# Altium PCB LEO_COTS_ant_rev1.PcbDoc
Units mil, origin at the board's own origin, x right, y up, seen from the top; angles counter-clockwise.
Board outline 1574.8 x 393.7 mil, 2 copper layers (Top Layer, Bottom Layer), stack 14.8 mil thick; 31 components, 24 nets, 126 pads, 30 vias.
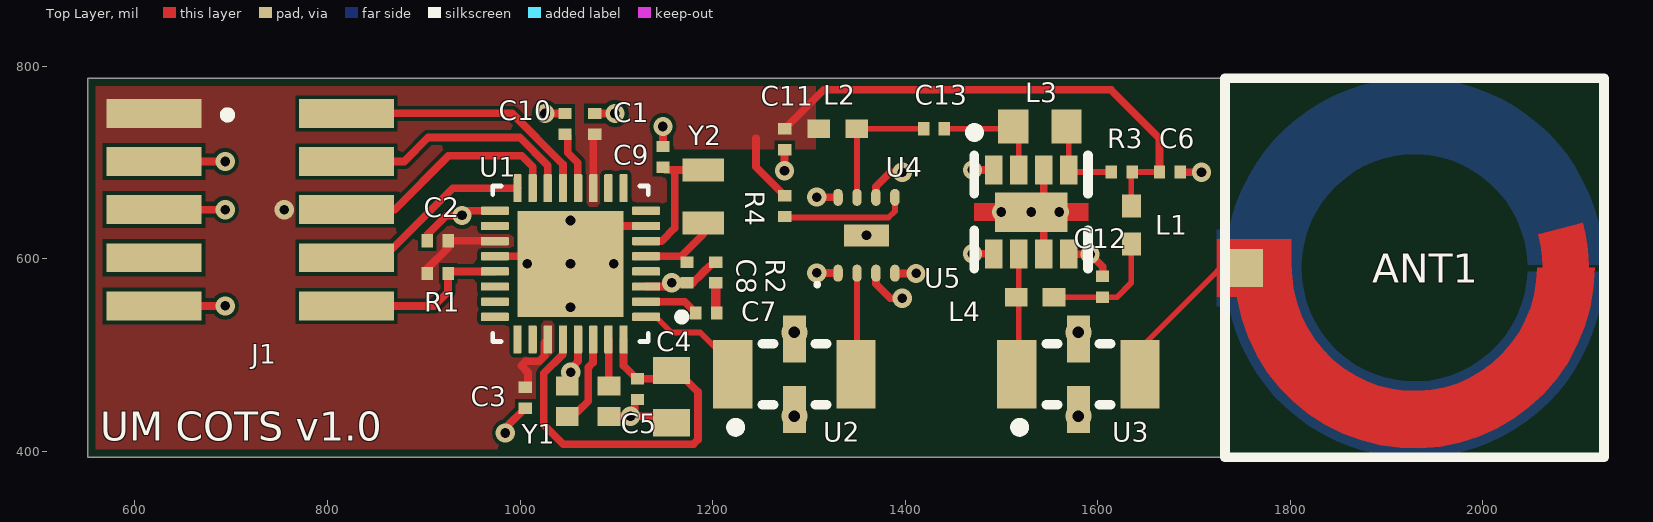
[diagram p0: Top Layer view]
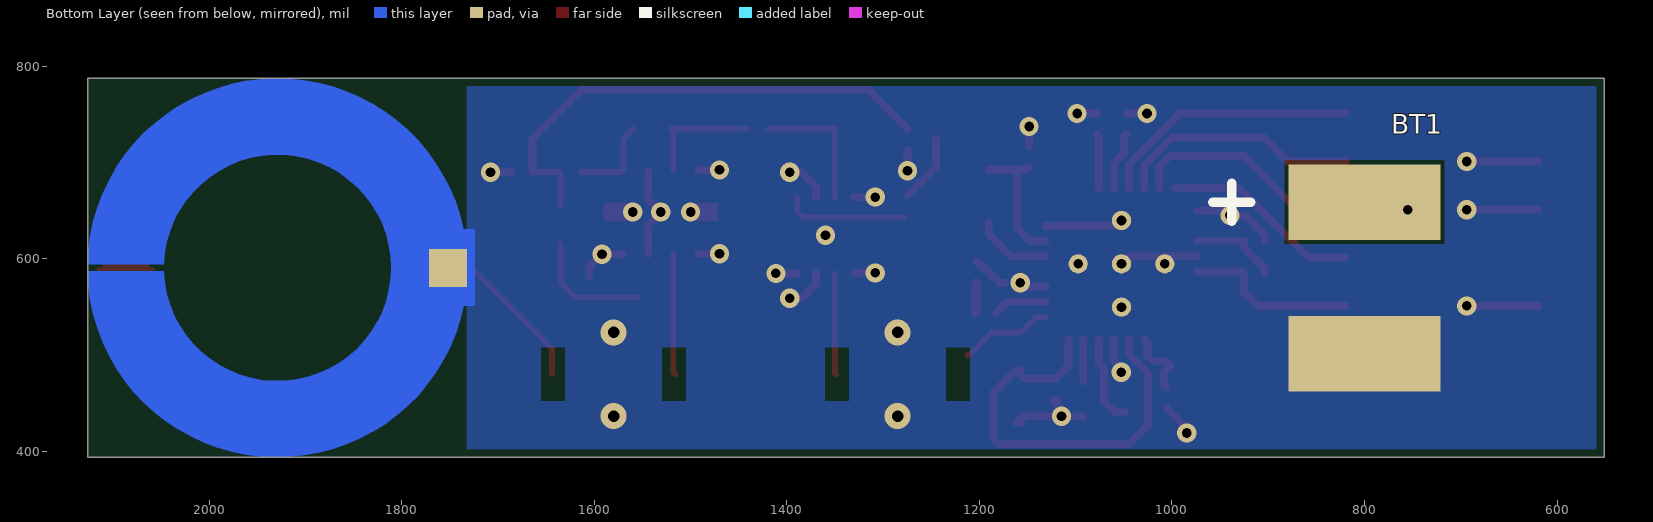
[diagram p1: Bottom Layer view, seen from below]
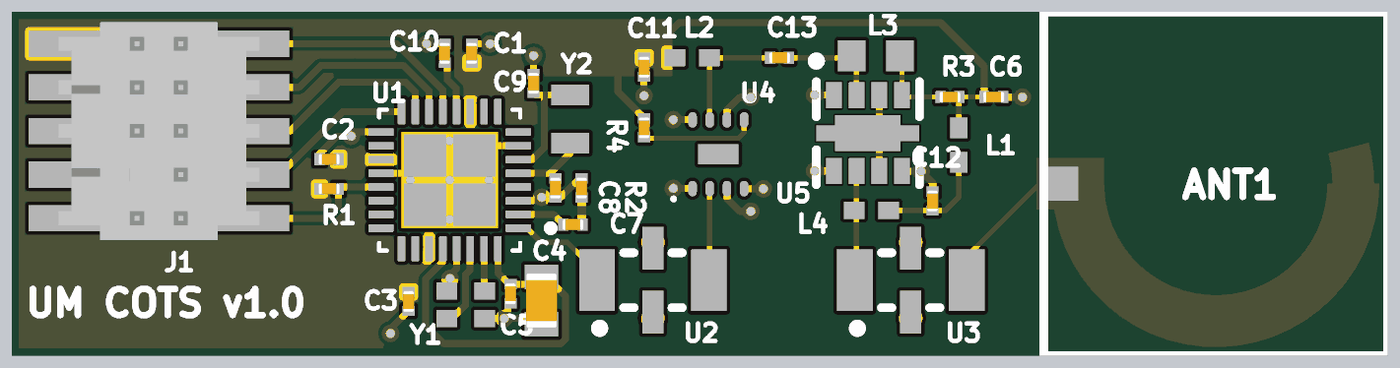
[diagram p2: 3D render of the assembled board from above, using the file's embedded part models]

## Layer stack, top to bottom
Top Solder: solder mask 0.4, Solder Resist, Dk 3.5
Top Layer: signal copper 1.4
Dielectric 1: core 12, RO4003C-012, Dk 3.55
Bottom Layer: signal copper 1.4
Bottom Solder: solder mask 0.4, Solder Resist, Dk 3.5

## Board outline
551.18,393.7 2125.98,393.7 2125.98,787.4 551.18,787.4

## Design rules (kind name [scope] priority, off if disabled: settings)
BoardOutlineClearance BoardOutlineClearance_1 [All] p1: gap=8 ignorepadtopadclearanceinfootprint=FALSE
Clearance [All] p1: gap=4 ignorepadtopadclearanceinfootprint=FALSE
HoleSize [All] p1: absolutevalues=TRUE maxlimit=100 minlimit=8 maxpercent=80.000 minpercent=20.000
MinimumAnnularRing [All] p1: minimumring=5
MinimumSolderMaskSliver [All] p1 off: minsoldermaskwidth=10
PlaneConnect [All] p1: planeconnectstyle=Direct reliefexpansion=20 reliefentries=4 reliefconductorwidth=10 reliefairgap=10
PolygonConnect [All] p1: connectstyle=Direct reliefconductorwidth=10 reliefentries=4 polygonreliefangle="90 Angle" airgapwidth=10
RoutingVias [All] p1: holewidth=10 width=20 viastyle="Through Hole" minholewidth=8 minwidth=16 maxholewidth=90 maxwidth=100
SilkToSilkClearance [All] p1 off: silktosilkclearance=10
SilkToSolderMaskClearance [IsPad] p1 off: minsilkscreentomaskgap=10 clearancetoexposedcopper=TRUE
SolderMaskExpansion [All] p1: expansion=4
Width [All] p1: maxlimit=100 minlimit=4 preferedwidth=4
25 further rules are at their usual default settings.

## Components (designator, comment, footprint, x,y, rotation, side; value= is the part's Value field where it differs from the comment)
ANT1 "ANT" RESLOOP_OD10_fw15_fl180_sw12_sl15 1929.13,590.55 r180 top
BT1 "BATT_LIPO" LIPO_1cm_1cm 800,580 r0 bottom
C1 "CAP_0201" CAPC0603X04N 1077.7,740 r270 top value=100nF
C2 "CAP_0201" CAPC0603X04N 914.4,618.7 r0 top value=100nF
C3 "CAP_0201" CAPC0603X04N 1005.4,455.7 r90 top value=100nF
C4 "CAP_0603" CAPC1608X05N 1157.48,456.69 r270 top value=10uF
C5 "CAP_0201" CAPC0603X04N 1122.05,464.57 r90 top value=100nF
C6 "CAP_0201" CAPC0603X04N 1675,690 r180 top value=100nF
C7 "CAP_0201" CAPC0603X04N 1193.4,543.7 r180 top value=12pF
C8 "CAP_0201" CAPC0603X04N 1173.4,585.7 r90 top value=12pF
C9 "CAP_0201" CAPC0603X04N 1148.4,705.7 r270 top value=12pF
C10 "CAP_0201" CAPC0603X04N 1046.7,740 r270 top value=1uF
C11 "CAP_0201" CAPC0603X04N 1275,724.17 r90 top value=100nF
C12 "CAP_0201" CAPC0603X04N 1605,570.83 r270 top value=100nF
C13 "CAP_0201" CAPC0603X04N 1430,735 r180 top value=12pF
J1 "10-Pin JTAG" FTSH-105-01-F-DV-007-K 719.7,651 r0 top
L1 "Inductor" 0402 1635,635 r270 top value=30nH
L2 "Inductor" 0402 1330,735 r0 top value=2.7nH
L3 "Inductor" 1608[0603] 1540,737.35 r180 top value=390nH
L4 "Inductor" 0402 1535,560 r180 top value=2.7nH
R1 "RES_0201" CAPC0603X04N 914.4,584.7 r180 top value=1K
R2 "RES_0201" CAPC0603X04N 1203.4,585.7 r270 top value=50
R3 "RES_0201" CAPC0603X04N 1625,690 r0 top value=432
R4 "RES_0201" CAPC0603X04N 1275,654.68 r90 top value=470
U1 "CC1350F128RSMR" QFN40P400X400X100-33N 1052.4,594.7 r180 top
U2 "BFCN-3085+" FV1206 1285,480 r0 top
U3 "BFCN-3085+" FV1206 1580,480 r0 top
U4 "MAAL-011078" PDFN-8 1359.84,624.37 r90 top
U5 "CMA-545+" DL1721 1531,648.5 r90 top
Y1 "830108160801" LFXTAL081608 1070.7,452 r180 top
Y2 "ECS-.327-7-12-TR" XTAL_ECS-.327-7-12-TR 1190.4,664.7 r90 top

## Footprints (in the part's own frame and the unit in brackets; to place one, negate y for a bottom-side part, rotate by r counter-clockwise, add the part's x,y. Pads: shape width x height; smd on the part's side, far side on the other; paste and mask are expansions set on the pad)
0402 [mm] "Chip Capacitor, Body 1.0x0.5mm, IPC High Density"
  rect 0.6x0.5 smd: 1(-0.5,0) 2(0.5,0)
  body extent -0.55,-0.3 0.55,0.3, height 1.3
1608[0603] [mm] "Chip Capacitor, Body 1.6x0.8mm, IPC High Density"
  rect 0.8x0.9 smd: 1(-0.7,0) 2(0.7,0)
  body extent -0.87,-0.48 0.87,0.48, height 1.3
CAPC0603X04N [mm] "Chip Capacitor, 2-Leads, Body 0.60x0.30mm, IPC Medium Density"
  rect 0.3x0.35 smd: 1(-0.275,0) 2(0.275,0)
  body extent -0.32,-0.17 0.32,0.17, height 0.35
CAPC1608X05N [mm] "Chip Capacitor, 2-Leads, Body 1.55x0.85mm, IPC Medium Density"
  rect 0.72x0.98 smd: 1(-0.69,0) 2(0.69,0)
  body extent -0.8,-0.45 0.8,0.45, height 0.5
DL1721 [mil]
  rect 30x18 smd paste+0 mask+2: 1(43.5,39) 2(43.5,13) 3(43.5,-13) 4(43.5,-39)
  rect 30x18 smd mask+2: 5(-43.5,-39) 6(-43.5,-13) 7(-43.5,13) 8(-43.5,39)
  rect 41x75 smd paste+0 mask+2: 9(0,0)
  Top Layer region: 9,-35.43 9,-59 -9,-59 -9,-35.43
  Top Layer region: -9,35.43 -9,59 9,59 9,35.43
  silkscreen extent -59,-59 88,64, body extent -59,-59 59,59, height 45
FTSH-105-01-F-DV-007-K [mil]
  rect 98.43x30 smd: 1(-100,100) 2(100,100) 3(-100,50) 4(100,50) 5(-100,0) 6(100,0) 7(-100,-50) 8(100,-50) 9(-100,-100) 10(100,-100)
  silkscreen extent -28,94 -20,102, body extent -115,-125 115,125, height 240
FV1206 [mm]
  rect 1.04x1.8 smd: 1(-1.625,0) 3(1.625,0)
  rect 0.61x1.245 smd: 2(0,-0.927) 4(0,0.927)
  silkscreen extent -1.67,-1.52 0.85,0.8, body extent -1.6,-0.8 1.6,0.8, height 0.94
LFXTAL081608 [mm] "1.6mm x 1.2mm SMD crystal"
  rect 0.6x0.5 smd: 1(-0.55,-0.4) 2(0.55,-0.4) 3(0.55,0.4) 4(-0.55,0.4)
  body extent -0.8,-0.6 0.8,0.6, height 0.4
LIPO_1cm_1cm [mm]
  rect 4x2 smd: 1(0,-2) 2(0,2)
  silkscreen extent 3,-2.5 4,-1.5
PDFN-8 [mm]
  oval 0.45x0.25 smd: 1(-1,0.75) 2(-1,0.25) 3(-1,-0.25) 4(-1,-0.75) 5(1,-0.75) 6(1,-0.25) 7(1,0.25) 8(1,0.75)
  rect 0.58x1.18 smd: 9(0,0)
  silkscreen extent -1.35,1.25 -1.25,1.35, body extent -1,-1 1,1, height 1
QFN40P400X400X100-33N [mm]
  rrect25% 0.74x0.22 smd: 1(-1.995,1.4) 2(-1.995,1) 3(-1.995,0.6) 4(-1.995,0.2) 5(-1.995,-0.2) 6(-1.995,-0.6) 7(-1.995,-1) 8(-1.995,-1.4) 17(1.995,-1.4) 18(1.995,-1) 19(1.995,-0.6) 20(1.995,-0.2) 21(1.995,0.2) 22(1.995,0.6) 23(1.995,1) 24(1.995,1.4)
  rrect25% 0.22x0.74 smd: 9(-1.4,-1.995) 10(-1,-1.995) 11(-0.6,-1.995) 12(-0.2,-1.995) 13(0.2,-1.995) 14(0.6,-1.995) 15(1,-1.995) 16(1.4,-1.995) 25(1.4,1.995) 26(1,1.995) 27(0.6,1.995) 28(0.2,1.995) 29(-0.2,1.995) 30(-0.6,1.995) 31(-1,1.995) 32(-1.4,1.995)
  round 0.508 hole 0.254: 33(-1.143,0) 33(0,1.143) 33(0,0) 33(0,-1.143) 33(1.143,0)
  rect 2.8x2.8 smd paste-2: 33(0,0)
  silkscreen extent -3.04,-2.05 2.05,2.05, body extent -2,-2 2,2, height 1
RESLOOP_OD10_fw15_fl180_sw12_sl15 [mm] "Microstrip resonant planar loop"
  rect 1x1 smd mask+0.102: 1(4.5,0)
  rect 1x1 smd far side mask+0.102: 2(4.5,0)
  Top Layer region: -4.75,0 -4.6,0 -4.561,-0.6 -4.443,-1.191 -4.443,-1.191 -3.284,-0.88 -3.371,-0.444 -3.4,0 -3.4,0 -3.25,0 -3.23,0.356 -3.172,0.709 -3.075,1.052 -2.941,1.383 -2.772,1.697 -2.569,1.991 -2.335,2.261 -2.073,2.503 -1.786,2.715 -1.477,2.895 -1.151,3.039 -0.81,3.147 -0.46,3.217 -0.105,3.248 0.252,3.24 0.606,3.193 0.953,3.107 1.288,2.984 1.607,2.825 1.907,2.632 2.184,2.406 2.435,2.152 2.656,1.872 2.846,1.57 3.001,1.248 3.12,0.912 3.208,0.52 3.248,0.12 3.25,0.009 3.25,-0.003 3.25,-0.75 5.2,-0.75 5.2,0.75 4.69,0.75 4.559,1.332 4.386,1.824 4.159,2.294 3.882,2.737 3.559,3.146 3.192,3.517 2.787,3.846 2.349,4.129 1.882,4.361 1.392,4.541 0.886,4.667 0.368,4.736 -0.153,4.748 -0.673,4.702 -1.185,4.6 -1.682,4.442 -2.159,4.231 -2.61,3.969 -3.029,3.659 -3.412,3.304 -3.754,2.91 -4.051,2.481 -4.298,2.021 -4.494,1.538 -4.636,1.036 -4.721,0.521
  Top Layer lines w0.013: 5.2,0.75 5.2,-0.75 3.25,-0.75 3.25,-0.401 3.25,-0.072 3.25,-0.017 3.25,-0.003 3.25,0.009 3.248,0.12 3.208,0.52 3.12,0.912 3.001,1.248 2.846,1.57 2.656,1.872 2.435,2.152 2.184,2.406 1.907,2.632 1.607,2.825 1.288,2.984 0.953,3.107 0.606,3.193 0.252,3.24 -0.105,3.248 -0.46,3.217 -0.81,3.147 -1.151,3.039 -1.477,2.895 -1.786,2.715 -2.073,2.503 -2.335,2.261 -2.569,1.991 -2.772,1.697 -2.941,1.383 -3.075,1.052 -3.172,0.709 -3.23,0.356 -3.25,0 -3.4,0 ccw(c0,0) -3.284,-0.88 -4.443,-1.191 cw(c0,0) -4.6,0 -4.75,0 -4.721,0.521 -4.636,1.036 -4.494,1.538 -4.298,2.021 -4.051,2.481 -3.754,2.91 -3.412,3.304 -3.029,3.659 -2.61,3.969 -2.159,4.231 -1.682,4.442 -1.185,4.6 -0.673,4.702 -0.153,4.748 0.368,4.736 0.886,4.667 1.392,4.541 1.882,4.361 2.349,4.129 2.787,3.846 3.192,3.517 3.559,3.146 3.882,2.737 4.159,2.294 4.386,1.824 4.559,1.332 4.69,0.75 5.2,0.75
  Bottom Layer region: -4.999,-0.1 -2.998,-0.1 -2.555,-1.572 -1.442,-2.631 0.05,-3 1.529,-2.581 2.606,-1.486 3,0 2.606,1.486 1.529,2.581 0.05,3 -1.442,2.631 -2.555,1.572 -2.998,0.1 -2.998,0.1 -4.999,0.1 -4.372,2.427 -2.729,4.189 -0.453,4.979 1.929,4.613 3.862,3.175 4.899,1 4.899,1 5.2,1 5.2,-1 4.899,-1 3.862,-3.175 1.929,-4.613 -0.453,-4.979 -2.729,-4.189 -4.372,-2.427 -4.999,-0.1
  Bottom Layer lines w0.013: 5.2,1 5.2,-1 4.899,-1 cw(c0,0) -4.999,-0.1 -2.998,-0.1 ccw(c0,0) -2.998,0.1 -4.999,0.1 cw(c0,0) 4.899,1 5.2,1
XTAL_ECS-.327-7-12-TR [mm]
  rect 0.6x1.1 smd: 1(-0.7,0) 2(0.7,0)
  body extent -1,-0.6 1,0.6, height 0.25

## Part data
ANT1: "PCB antenna"
C1 C2 C3 C5 C6 C11 C12: "CAP CER 100nF 0201"
C4: "CAP CER 10uF 0603"
C7 C8 C9: "CAP CER 12pF 0201"
C10: "CAP CER 1uF 0201"
C13: "CAP CER 12pF 0201", Supplier Part Number 1=490-11308-1-ND, Supplier 1=Digi-Key
J1: library part CM10, "10-pin JTAG", Supplier Part Number 1=FTSH-105-01-L-DV-007-K-P-ND, Supplier 1=Digi-Key
L1: Supplier Part Number 1=2035-0402HP-300EKTSCT-ND, Code_IEC=1005, Code_JEITA=0402, LatestRevisionDate=29-May-2009, LatestRevisionNote="IPC-7351 Footprint Added.", PackageDescription="Chip Inductor", PackageReference=0402-A, Published=8-Jun-2000, Publisher="Altium Limited", Supplier 1=Digi-Key
L2 L4: Supplier Part Number 1=2035-1403-1-ND, Code_IEC=1005, Code_JEITA=0402, LatestRevisionDate=29-May-2009, LatestRevisionNote="IPC-7351 Footprint Added.", PackageDescription="Chip Inductor", PackageReference=0402-A, Published=8-Jun-2000, Publisher="Altium Limited", Supplier 1=Digi-Key
L3: Supplier Part Number 1=490-LQW18CNR39J0ZDCT-ND, Code_IEC=1005, Code_JEITA=0402, LatestRevisionDate=29-May-2009, LatestRevisionNote="IPC-7351 Footprint Added.", PackageDescription="Chip Inductor", PackageReference=0402-A, Published=8-Jun-2000, Publisher="Altium Limited", Supplier 1=Digi-Key
R1: library part "Res Semi", "RES 1K OHM 0201", LatestRevisionDate=17-Jul-2002, LatestRevisionNote="Re-released for DXP Platform.", PackageDescription="Axial Device, Thru-Hole; 2 Leads; 0.5 in Pin Spacing", PackageReference=AXIAL-0.5, Published=8-Jun-2000, Publisher="Altium Limited"
R2: library part "Res Semi", "RES 50 OHM 0201", LatestRevisionDate=17-Jul-2002, LatestRevisionNote="Re-released for DXP Platform.", PackageDescription="Axial Device, Thru-Hole; 2 Leads; 0.5 in Pin Spacing", PackageReference=AXIAL-0.5, Published=8-Jun-2000, Publisher="Altium Limited"
R3: library part "Res Semi", "RES 50 OHM 0201", Supplier Part Number 1=P123009CT-ND, LatestRevisionDate=17-Jul-2002, LatestRevisionNote="Re-released for DXP Platform.", PackageDescription="Axial Device, Thru-Hole; 2 Leads; 0.5 in Pin Spacing", PackageReference=AXIAL-0.5, Published=8-Jun-2000, Publisher="Altium Limited", Supplier 1=Digi-Key
R4: library part "Res Semi", "RES 50 OHM 0201", Supplier Part Number 1=P123030CT-ND, LatestRevisionDate=17-Jul-2002, LatestRevisionNote="Re-released for DXP Platform.", PackageDescription="Axial Device, Thru-Hole; 2 Leads; 0.5 in Pin Spacing", PackageReference=AXIAL-0.5, Published=8-Jun-2000, Publisher="Altium Limited", Supplier 1=Digi-Key
U1: "Ultra-Low-Power Dual-Band Wireless MCU", Supplier Part Number 1=296-48897-1-ND, Supplier 1=Digi-Key
U2 U3: "2800 to 3400 MHz Band-Pass Filter", Supplier 1=Mini-Circuits, Supplier Part Number 1=BFCN-3085+
U4: "Wideband LNA", Supplier Part Number 1=1465-1489-1-ND, Manufacturer Part Number=MAAL-011078, Supplier 1=Digi-Key
U5: "Wideband LNA", Supplier 1=Mini-Circuits, Supplier Part Number 1=CMA-545+
Y1: "24 MHz crystal", Package=None, Availability=Unavailable, MP=ECS-.327-7-12-TR, Price=None
Y2: "32.768 kHz SMD Crystal", Package=None, Availability=Unavailable, MP=ECS-.327-7-12-TR, Price=None

## Via types
v1: diameter 20, hole 10, Top Layer to Bottom Layer, tented both sides, 22 vias
v2: diameter 20, hole 10, Top Layer to Bottom Layer, 4 vias
v3: diameter 27, hole 12, Top Layer to Bottom Layer, 4 vias

## Nets (pads, with @x,y where several pads share a name; then routed paths per layer and width w, separated by ;. In a path a pad name is that pad's centre, name@x,y a point inside that pad or via, vN(x,y) a via of type N, cw(c..) or ccw(c..) an arc to the next point about the centre after c; other vN are vias at no path point)
GND: ANT1.2 BT1.2 C1.1 C2.1 C3.1 C4.2 C5.1 C6.1 C8.1 C9.1 C10.1 C11.1 C12.1 J1.3 J1.5 J1.9 R2.1 U1.3 U1.7 U1.17 U1.20 U1.29 U1.33 U2.2 U2.4 U3.2 U3.4 U4.1 U4.3 U4.4 U4.6 U4.8 U4.9 U5.1 U5.3 U5.5 U5.6 U5.8 U5.9 Y1.2 Y1.4 | length 1154.3
  Top Layer w8: J1.9 v1(693.7,551) ; J1.5 v1(693.7,651) ; J1.3 v1(693.7,701) ; C2.1 903.57,624.87 923.7,645 v1(939.7,645) 944.52,649.82 U1.17 ; U1.20 1044.53,602.57 U1.33@1052.4,594.7 ; v1(984.7,419) 984.7,424.17 C3.1 ; v1(1025.87,750.83) C10.1 ; v1@1049.05,482.35 1060.28,493.57 U1.29 ; U1.33@1060.28,634.07 U1.7 ; C1.1 v1(1098.53,750.83) ; Y1.4 v1(1114.78,436.25) ; C5.1@1123.95,451.83 C5.1 1121.06,453.74 1119.16,451.83 1119.16,443.88 1114.78,439.5 v1(1114.78,436.25) ; U1.3 1151.78,571.08 1155.7,575 v1(1157.7,575) ; C9.1 v1(1148.4,737.35) ; C4.2@1156.3,429.53 C4.2 1161.42,429.53 1154.69,436.25 v1(1114.78,436.25) ; C8.1 1179.57,574.87 1188.51,583.81 1188.51,584.09 1193.2,588.78 1193.48,588.78 1201.23,596.53 R2.1 ; v1(1274.74,691.35) C11.1@1274.74,713.09 ; v1(1308.31,585.26) U4.1@1330.06,585.26 ; v1(1308.31,664) U4.8@1330.06,664 ; U4.3 1369.68,574.06 1384.74,559 v1(1397,559) ; U4.6 1369.68,674.68 1384.74,689.74 v1(1397,689.74) ; U4.4@1389.63,584.74 v1(1411.37,584.74) ; v1(1470,605.26) U5.8@1491.74,605.26 ; v1(1470,692.26) 1491.74,692.26 U5.1 ; U5.6 1544,635.5 v2(1531,648.5) 1544,661.5 U5.3 ; U5.5@1570.26,604.74 v1(1592,604.74) 1605.26,591.48 C12.1@1605.26,581.91 ; C6.1@1686.09,689.74 v1(1707.83,689.74)
  other v1: 1052.7,482
  other v2: 1359.84,624.37 1500,648.5 1560,648.5
  other v3: 1285,436.5 1580,436.5 1285,523.5 1580,523.5
JTAG_RSTN: J1.10 R1.1 U1.21 | length 180.2
  Top Layer w8: J1.10 910.7,551 925.23,565.53 R1.1 927.35,586.83 U1.21
JTAG_TCK: J1.4 U1.14 | length 255.1
  Top Layer w8: J1.4 879.7,701 904.7,726 999.63,726 1028.78,696.85 U1.14
JTAG_TDI: J1.8 U1.16 | length 207.5
  Top Layer w8: J1.8 857.7,601 929.94,673.24 U1.16
JTAG_TDO: J1.6 U1.15 | length 243.6
  Top Layer w8: J1.6 869.7,651 925.7,707 1001.66,707 1013.03,695.62 U1.15
JTAG_TMS: J1.2 U1.13 | length 271.6
  Top Layer w8: J1.2 991.6,751 1044.53,698.07 U1.13
NetANT1_1: ANT1.1 U3.3 | length 151.6
  Top Layer w6: U3.3 1643.98,506.69 1724.41,587.13 ANT1.1@1732.28,595
NetC4_1: C4.1 C5.2 U1.28 U1.32 | length 443.5
  Top Layer w8: U1.28 1044.2,515.83 1044.2,500.5 1024.7,481 1024.7,427.63 1044.98,407.35 1180.09,407.35 1184.77,412.04 1184.77,461.69 1162.6,483.86 C4.1@1161.42,483.86 ; U1.32 1107.52,488.94 1121.06,475.39 C5.2 1152.95,475.39 C4.1@1161.42,483.86 ; C4.1 C4.1@1161.42,483.86
NetC7_1: C7.1 R2.2 | length 31.5
  Top Layer w10: R2.2 1203.4,544.53 C7.1
NetC7_2: C7.2 U1.2 | length 56.4
  Top Layer w8: U1.2 1170.94,555.33 C7.2
NetC8_2: C8.2 U1.5 Y2.1 | length 80.5
  Top Layer w8: U1.5 1167.35,602.57 1190.4,625.62 Y2.1
NetC9_2: C9.2 U1.6 Y2.2 | length 138.8
  Top Layer w8: U1.6 1147.02,618.32 1160.7,632 1160.7,692.26 ; C9.2 1151.02,692.26 1160.7,692.26 ; Y2.2 1160.7,692.26
NetC10_2: C10.2 U1.12 | length 62.1
  Top Layer w8: C10.2 1047.69,729.17 1049.59,727.27 1049.59,709.98 1059.94,699.62 1059.94,673.57 U1.12
NetC12_2: C12.2 L1.2 L4.1 | length 126.8
  Top Layer w6: L4.1 C12.2 1620,560 1635,575 L1.2
NetC13_1: C13.1 L3.2 U5.2 | length 123.4
  Top Layer w6: C13.1 1518,735 1520.31,735 1518,732.68 U5.2
NetC13_2: C13.2 L2.2 U4.7 | length 140.9
  Top Layer w6: U4.7 1350,734.69 L2.2 C13.2
NetL3_1: L3.1 R3.1 U5.4 | length 92.3
  Top Layer w6: L3.1@1559.68,735 1570,724.68 U5.4 1572,690 R3.1
NetL4_2: L4.2 U3.1 U5.7 | length 125.8
  Top Layer w6: U3.1 1518,481.98 U5.7
NetR4_1: R4.1 U4.5 | length 128.9
  Top Layer w6: R4.1@1277.61,642.79 1382.79,642.79 1389.37,649.37 U4.5
NetU1_1: U1.1 U2.1 | length 98
  Top Layer w6: U1.1 1141.18,539.58 1157.26,523.5 1187.13,523.5 1210.63,500 U2.1@1212.6,500
NetU1_30: U1.30 Y1.3 | length 92.9
  Top Layer w8: Y1.3@1048.75,440.95 1059.65,440.95 1070.7,452 1070.7,487.03 1075.69,492.02 1075.69,515.83 U1.30
NetU1_31: U1.31 Y1.1 | length 43.8
  Top Layer w8: U1.31 1092.06,515.87 Y1.1@1092.06,472.45
NetU2_3: U2.3 U4.2 | length 105.4
  Top Layer w6: U2.3 1350,481.02 U4.2
VDDS: BT1.1 C1.2 C2.2 C3.2 C6.2 C11.2 J1.1 L1.1 L2.1 R1.2 R3.2 R4.2 U1.11 U1.19 U1.27 | length 819.8
  Top Layer w6: L1.1 1635,689.17 R3.2 C6.2
  Top Layer w8: R1.2 903.57,589.87 925.23,611.53 C2.2 973.48,618.7 U1.19 ; C3.2 1006.39,466.53 1008.29,468.43 1008.29,481.84 1001.38,488.75 1006.21,493.59 1020.04,493.59 1025.36,498.91 1025.36,512.74 U1.27 ; U1.11 1076.02,727.5 C1.2 ; 1245,725 1245,695.51 R4.2 ; C11.2 1315.4,775.4 1613.77,775.4 1664.17,725 C6.2
  other v1: 755,651
pads on no net: J1.7 U1.4 U1.8 U1.9 U1.10 U1.18 U1.22 U1.23 U1.24 U1.25 U1.26

## Polygon pours and split planes (outlines as drawn)
VDDS on Top Layer "Top Layer-VDDS" (solid, pour order 6): 1160.7,713.91 1307.09,713.91 1307.09,787.4 551.18,787.4 551.18,394 1086.7,394 1086.7,558 1160.7,632
GND on Bottom Layer "Bottom Layer-GND" (solid, pour order 2): 1732.28,393.7 1732.28,786.99 551.18,787.45 551.18,394.04

## Other copper
Bottom Layer:
  pour cut-out: 1630.71,507.56 1630.71,452.44 1655,452.44 1655,507.56
  pour cut-out: 1529.29,452.44 1529.29,507.56 1505,507.56 1505,452.44
  pour cut-out: 1234.29,452.44 1234.29,507.56 1210,507.56 1210,452.44
  pour cut-out: 1335.71,507.56 1335.71,452.44 1360,452.44 1360,507.56

## Silkscreen, mask and mechanical layers (free items; w line width, h text height)
Top Overlay:
  lines w10: 1732.28,393.7 1732.28,787.4 2125.98,787.4 2125.98,393.7 1732.28,393.7
  text "UM COTS v1.0" at 563.7,411 h30
Mechanical 5 (Mech5):
  the board outline again, w1